# Altium PCB PCB1.PcbDoc
Units mm, origin at the board's own origin, x right, y up, seen from the top; angles counter-clockwise.
Board outline 47.5 x 26.5 mm, 2 copper layers (Top Layer, Bottom Layer), stack 1.571 mm thick; 7 components, 5 nets, 22 pads, 37 vias.
Unrouted connection lines stored in the file: 6.
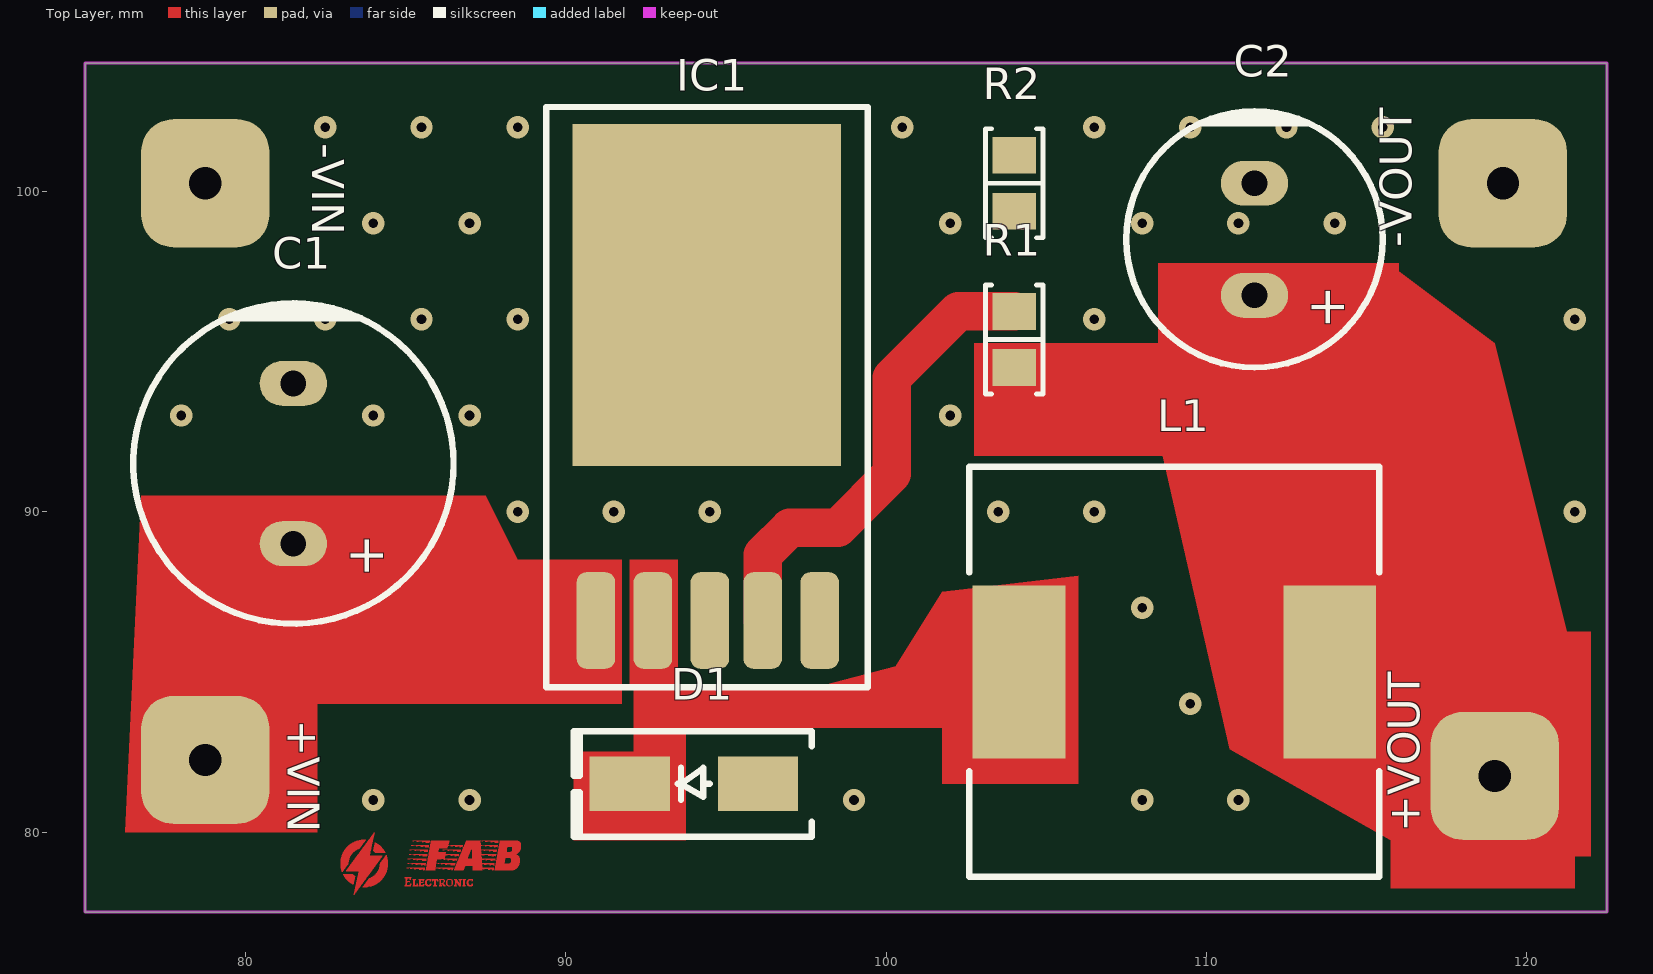
[diagram p0: Top Layer view]
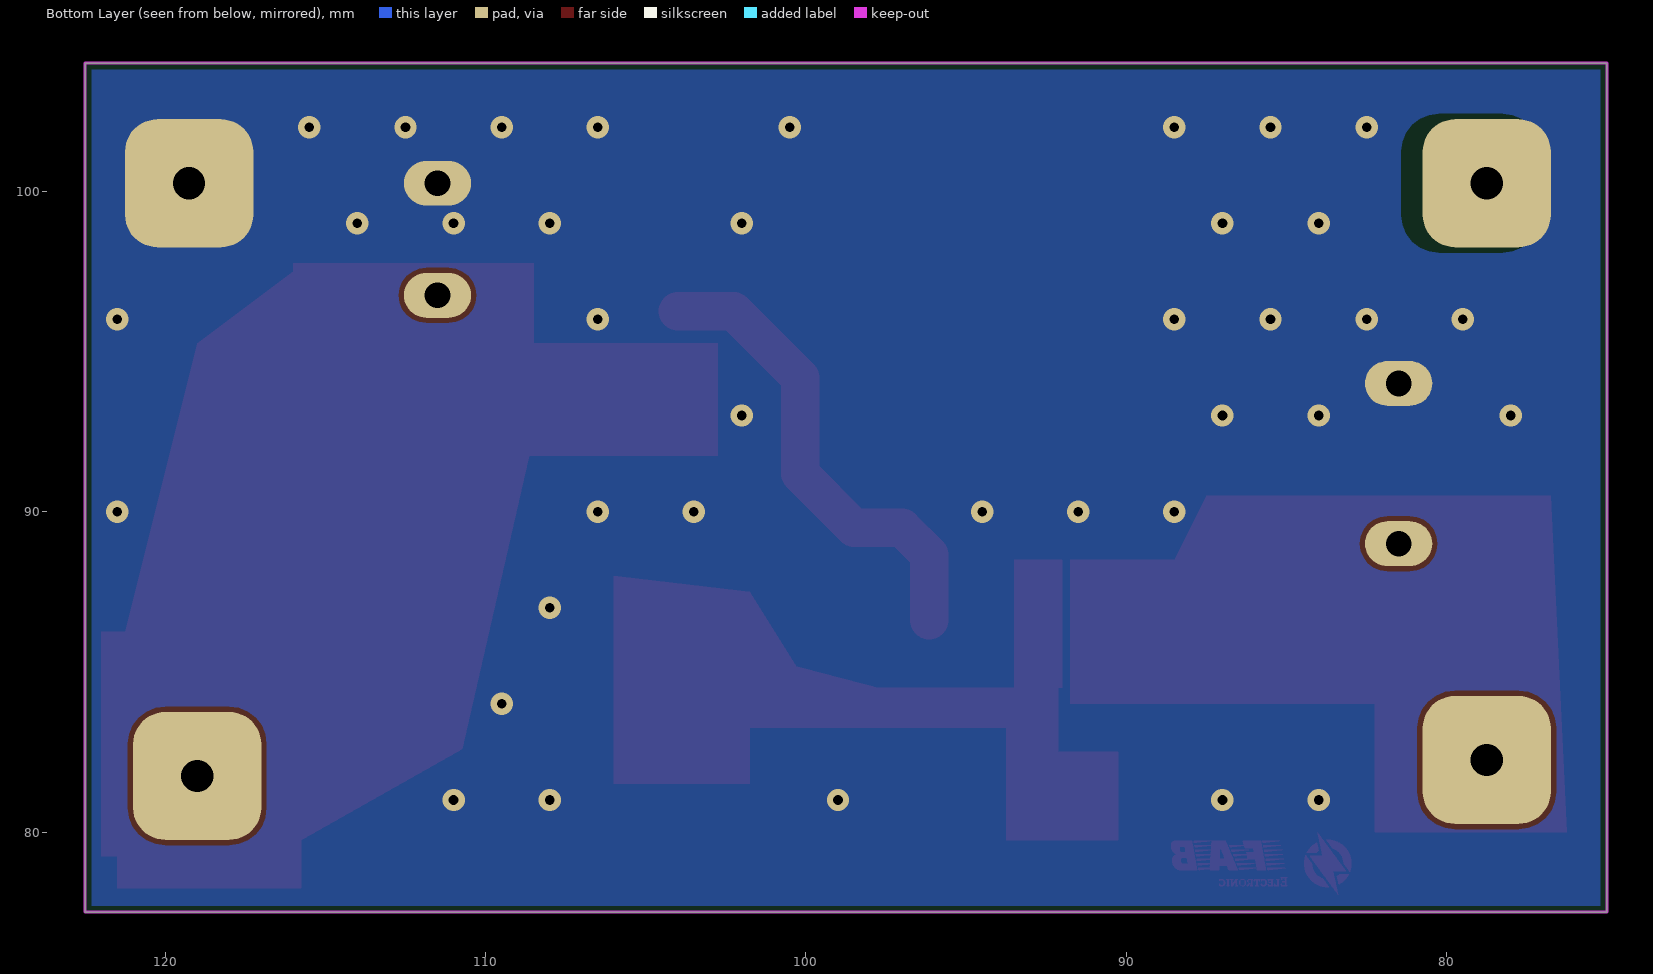
[diagram p1: Bottom Layer view, seen from below]
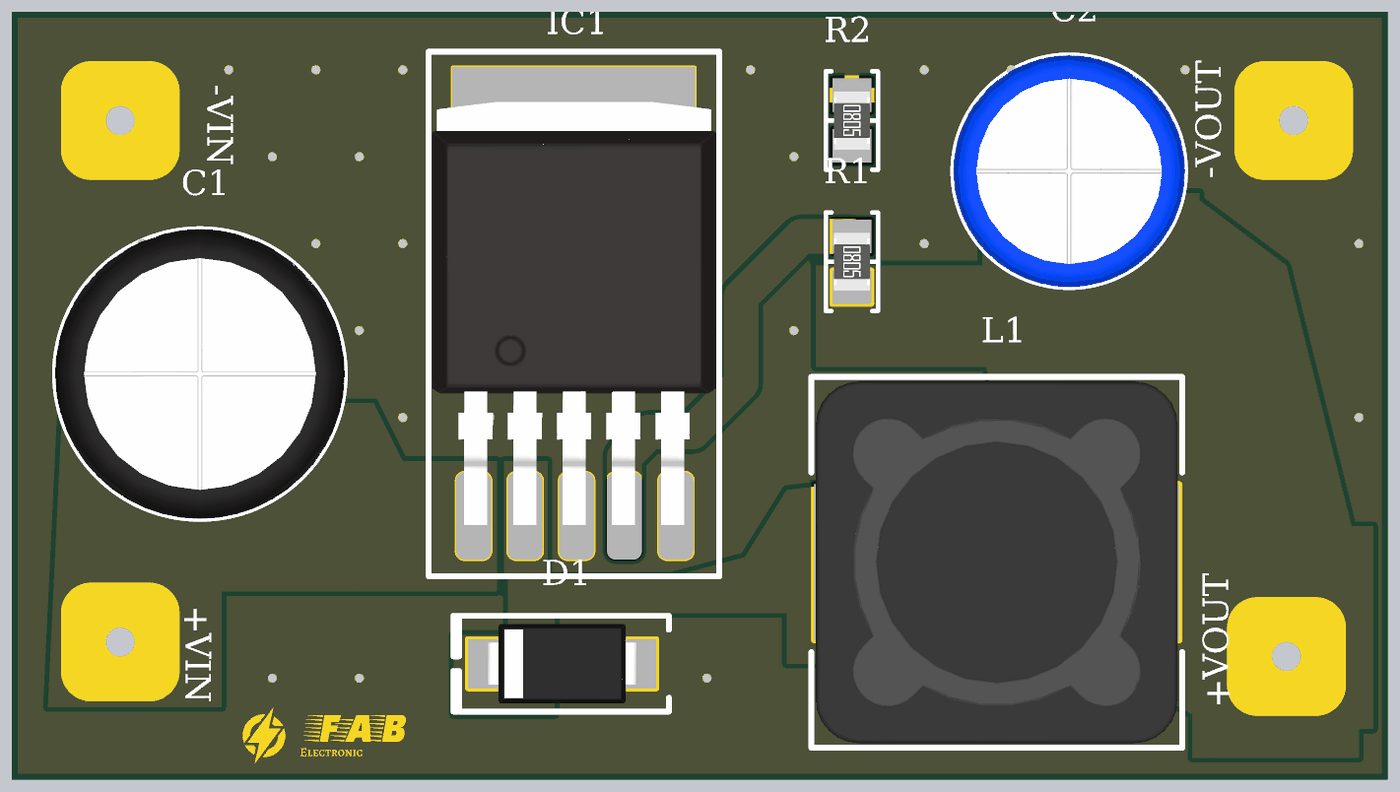
[diagram p2: 3D render of the assembled board from above, using the file's embedded part models]

## Layer stack, top to bottom
Top Solder: solder mask 0.0102, Solder Resist, Dk 3.5
Top Layer: signal copper 0.0356
Dielectric 1: dielectric 1.5, FR-4, Dk 4.8
Bottom Layer: signal copper 0.0356
Bottom Solder: solder mask 0.0102, Solder Resist, Dk 3.5

## Board outline
75,77.5 122.5,77.5 122.5,104 75,104

## Design rules (kind name [scope] priority, off if disabled: settings)
Clearance [All] p1: gap=0.152 ignorepadtopadclearanceinfootprint=FALSE
HoleSize [All] p1: absolutevalues=TRUE maxlimit=5 minlimit=0.025 maxpercent=80.000 minpercent=20.000
PolygonConnect [All] p1: thpad.connectstyle=Direct thpad.reliefconductorwidth=0.254 thpad.reliefentries=4 thpad.polygonreliefangle="90 Angle" thpad.airgapwidth=0.254 smdpad.connectstyle=Relief smdpad.reliefconductorwidth=0.5 smdpad.reliefentries=4 smdpad.polygonreliefangle="90 Angle" smdpad.airgapwidth=0.2 via.connectstyle=Direct via.reliefconductorwidth=0.254 via.reliefentries=4 via.polygonreliefangle="90 Angle" via.airgapwidth=0.254
RoutingVias [All] p1: holewidth=0.711 width=1.27 viastyle="Through Hole" minholewidth=0.711 minwidth=1.27 maxholewidth=0.711 maxwidth=1.27
SolderMaskExpansion [All] p1: expansion=0.102 istentingtop=FALSE
Width [All] p1: maxlimit=2 minlimit=0.152 preferedwidth=0.5
29 further rules are at their usual default settings.

## Components (designator, comment, footprint, x,y, rotation, side; value= is the part's Value field where it differs from the comment)
C1 "100µF" "CAP TH ALUM ELEC D10.00mm S5.00mm H10.50mm" 81.5,91.5 r270 top
C2 "220 µF" "CAP TH ALPOLY D8.00mm S3.50mm H13.50mm" 111.5,98.5 r270 top
D1 "ACDBA560-HF" "DO214AC SMA" 94,81.5 r180 top
IC1 "LM2596" D2PAK 94.5,96 r0 top
L1 "33 µH" "BOURNS SRR1280" 109,85 r0 top
R1 "10 kOhms" "RES 0805_2012" 104,95.375 r270 top
R2 "4.7 kOhms" "RES 0805_2012" 104,100.25 r270 top

## Footprints (in the part's own frame and the unit in brackets; to place one, negate y for a bottom-side part, rotate by r counter-clockwise, add the part's x,y. Pads: shape width x height; smd on the part's side, far side on the other; paste and mask are expansions set on the pad)
"BOURNS SRR1280" [mm] "Precision Wire Wound Inductor, 2-Leads, Body 12.50x12.50mm, IPC Medium Density"
  rect 2.9x5.4 smd: 1(-4.85,0) 2(4.85,0)
  silkscreen extent -6.4,-6.4 6.4,6.4, body extent -6.25,-6.25 6.25,6.25, height 7.9
"CAP TH ALPOLY D8.00mm S3.50mm H13.50mm" [mm] "8.00mm Diameter 13.50mm Lead Spacing Aluminum - Polymer Capacitors Radial, Can"
  oval 1.4x2.1 hole 0.8: 1(1.75,0) 2(-1.75,0)
  silkscreen extent -4,-4 4,4, body extent -4.01,-4 4,4, height 13.5
"CAP TH ALUM ELEC D10.00mm S5.00mm H10.50mm" [mm] "10mm Diameter 5mm Lead Spacing Aluminum Electrolytic Capacitors Radial, Can"
  oval 1.4x2.1 hole 0.8: 1(2.5,0) 2(-2.5,0)
  silkscreen extent -5,-5 5,5, body extent -5.01,-5 5,5, height 10.5
D2PAK [mm]
  rrect50% 1.2x3.015 smd mask+0.05: 1(-3.556,-9.398) 2(-1.778,-9.398) 3(0,-9.398) 4(1.651,-9.398) 5(3.429,-9.398)
  rect 8.38x10.66 smd mask+0.05: 3(-0.102,0.762)
  silkscreen extent -5.11,-11.48 4.93,6.63, body extent -5,-9.71 4.83,4.89, height 4.22
"DO214AC SMA" [mm] "Molded Diode, 2-Leads, Body 4.30x2.60mm, IPC Medium Density"
  rect 2.5x1.7 smd: 1(-2,0) 2(2,0)
  silkscreen extent -3.68,-1.65 3.75,1.65, body extent -2.6,-1.37 2.6,1.37, height 2.4
"RES 0805_2012" [mm] "Chip Resistor, 2-Leads, Body 2.00x1.25mm, IPC Medium Density"
  rect 1.15x1.35 smd: 1(-0.875,0) 2(0.875,0)
  silkscreen extent -1.7,-0.9 1.7,0.9, body extent -1,-0.62 1,0.63, height 0.6

## Part data
C1: library part URS1J101MPD1TD, "CAP ALUM 100UF 20% 63V RADIAL", Device Package="Radial, Can", Lifetime @ Temp.="2000 Hrs @ 85°C", manufacturer=Nichicon, Operating Temperature="-40°C ~ 85°C", Ripple Current @ High Frequency="375mA @ 10kHz", Ripple Current @ Low Frequency="250mA @ 120Hz", Supplier Part Number 1=493-11829-1-ND, Tolerance=±20%, Voltage - Rated=63V, Applications="General Purpose", Capacitance=100µF, componentlink1description=Datasheet, componentlink1url=http://nichicon-us.com/english/products/pdfs/e-urs.pdf, componentlink2description="DigiKey Link", componentlink2url=http://digikey.com/product-detail/en/nichicon/URS1J101MPD1TD/493-11829-1-ND/4320229, Height - Seated (Max)="0.413\" (10.50mm)", lastupdated="2.09.2020 01:26:22", Lead Spacing="0.197\" (5.00mm)", Lifecycle Status=Active, Minimum Order=1, Mounting Type="Through Hole", Package / Case="Radial, Can", packaging=TapeAndBox, Part Number=URS1J101MPD1TD, Part Status=Active, partid=9501, Polarization=Polar, price=0.18, series=URS, Size / Dimension="0.394\" Dia (10.00mm)", Supplier 1=DigiKey
C2: library part 227AVG035MFBJ, "CAP ALUM POLY 220UF 20% 35V T/H", Device Package="Radial, Can", ESR (Equivalent Series Resistance)=26mOhm, Lifetime @ Temp.="1500 Hrs @ 125°C", manufacturer="Illinois Capacitor", Operating Temperature="-55°C ~ 125°C", Ripple Current @ High Frequency="2.95 A @ 100 kHz", Ripple Current @ Low Frequency="147.5 mA @ 120 Hz", Supplier Part Number 1=1572-1695-ND, Tolerance=±20%, Voltage - Rated="35 V", Applications="General Purpose", Capacitance="220 µF", componentlink1description=Datasheet, componentlink1url=http://www.illinoiscapacitor.com/pdf/seriesDocuments/AVG%20series.pdf, componentlink2description="DigiKey Link", componentlink2url=https://www.digikey.com/en/products/detail/illinois-capacitor/227AVG035MFBJ/5411696, Height - Seated (Max)="0.532\" (13.50mm)", lastupdated="6.05.2023 20:46:02", Lead Spacing="0.138\" (3.50mm)", Lifecycle Status=Active, Minimum Order=1, Mounting Type="Through Hole", Package / Case="Radial, Can", packaging=Bulk, Part Number=227AVG035MFBJ, Part Status=Active, partid=3875, price=1.05, series=AVG, Size / Dimension="0.315\" Dia (8.00mm)", Supplier 1=DigiKey, Type=Polymer
D1: "DIODE SCHOTTKY 60V 5A DO214AC", Capacitance @ Vr, F="250pF @ 4V, 1MHz", Current - Average Rectified (Io)=5A, Current - Reverse Leakage @ Vr="500 µA @ 60 V", manufacturer="Comchip Technology", Operating Temperature - Junction="-55°C ~ 125°C", Package / Case="DO-214AC, SMA", Supplier Device Package="DO-214AC (SMA)", Supplier Part Number 1=641-2078-1-ND, Voltage - DC Reverse (Vr) (Max)="60 V", Voltage - Forward (Vf) (Max) @ If="700 mV @ 5 A", componentlink1description=Datasheet, componentlink1url=http://www.comchiptech.com/admin/files/product/ACDBA560-HF%20RevA201382.pdf, componentlink2description="DigiKey Link", componentlink2url=https://www.digikey.com/en/products/detail/comchip-technology/ACDBA560-HF/7100903, Diode Type=Schottky, lastupdated="6.05.2023 20:10:43", Lifecycle Status=Active, Minimum Order=1, Mounting Type="Surface Mount", packaging=TapeAndReel, Part Number=ACDBA560-HF, Part Status=Active, partid=1832, price=0.15, series="Automotive, AEC-Q101", Speed="Fast Recovery =< 500ns, > 200mA (Io)", Supplier 1=DigiKey
L1: library part SRR1280-330M, "FIXED IND 33UH 3.5A 57 MOHM SMD", Current - Saturation=3.3A, Current Rating (Amps)="3.5 A", DC Resistance (DCR)="57mOhm Max", Device Package=Nonstandard, Frequency - Self Resonant=9.5MHz, manufacturer="Bourns Inc.", Operating Temperature="-40°C ~ 125°C", Q @ Freq="28 @ 2.52MHz", Supplier Part Number 1=SRR1280-330MCT-ND, Tolerance=±20%, Inductance Frequency - Test="100 kHz", componentlink1description=Datasheet, componentlink1url=https://www.bourns.com/docs/Product-Datasheets/SRR1280.pdf, componentlink2description="DigiKey Link", componentlink2url=https://www.digikey.com/en/products/detail/bourns-inc/SRR1280-330M/1969998, Height - Seated (Max)="0.315\" (8.00mm)", lastupdated="6.05.2023 20:20:35", Lifecycle Status=Active, Material - Core=Ferrite, Minimum Order=1, Mounting Type="Surface Mount", Package / Case=Nonstandard, packaging=TapeAndReel, Part Number=SRR1280-330M, Part Status=Active, partid=25, price=0.53, series=SRR1280, Shielding=Shielded, Size / Dimension="0.492\" L x 0.492\" W (12.50mm x 12.50mm)", Supplier 1=DigiKey, Type="Drum Core, Wirewound", Inductance="33 µH"
R1: library part CRGP0805F10K, "RES 10K OHM 1% 1/3W 0805", Device Package="0805 (2012 Metric)", manufacturer="TE Connectivity Passive Product", Operating Temperature="-55°C ~ 155°C", Power (Watts)="0.333W, 1/3W", Supplier Device Package=0805, Supplier Part Number 1=A130489CT-ND, Temperature Coefficient=±100ppm/°C, Tolerance=±1%, componentlink1description=Datasheet, componentlink1url=https://www.te.com/commerce/DocumentDelivery/DDEController?Action=srchrtrv&DocNm=9-1773463-9&DocType=DS&DocLang=English, componentlink2description="DigiKey Link", componentlink2url=https://www.digikey.com/en/products/detail/te-connectivity-passive-product/CRGP0805F10K/8577091, Composition="Thick Film", Features="Pulse Withstanding", Height - Seated (Max)="0.026\" (0.65mm)", lastupdated="6.05.2023 19:56:35", Lifecycle Status=Active, Minimum Order=1, Number of Terminations=2, Package / Case="0805 (2012 Metric)", packaging=TapeAndReel, Part Number=CRGP0805F10K, Part Status=Active, partid=41700, price=0.02, Resistance="10 kOhms", series=CRGP, Size / Dimension="0.079\" L x 0.049\" W (2.00mm x 1.25mm)", Supplier 1=DigiKey
R2: library part CRGP0805F4K7, "RES 4.7K OHM 1% 1/3W 0805", Device Package="0805 (2012 Metric)", manufacturer="TE Connectivity Passive Product", Operating Temperature="-55°C ~ 155°C", Power (Watts)="0.333W, 1/3W", Supplier Device Package=0805, Supplier Part Number 1=A130485CT-ND, Temperature Coefficient=±100ppm/°C, Tolerance=±1%, componentlink1description=Datasheet, componentlink1url=https://www.te.com/commerce/DocumentDelivery/DDEController?Action=srchrtrv&DocNm=9-1773463-9&DocType=DS&DocLang=English, componentlink2description="DigiKey Link", componentlink2url=https://www.digikey.com/en/products/detail/te-connectivity-passive-product/CRGP0805F4K7/8577087, Composition="Thick Film", Features="Pulse Withstanding", Height - Seated (Max)="0.026\" (0.65mm)", lastupdated="6.05.2023 19:57:17", Lifecycle Status=Active, Minimum Order=1, Number of Terminations=2, Package / Case="0805 (2012 Metric)", packaging=TapeAndReel, Part Number=CRGP0805F4K7, Part Status=Active, partid=28726, price=0.02, Resistance="4.7 kOhms", series=CRGP, Size / Dimension="0.079\" L x 0.049\" W (2.00mm x 1.25mm)", Supplier 1=DigiKey

## Free pads (board coordinates)
  rrect50% 4x4 hole 1 mask+0.05: +VIN(78.75,82.25) +VOUT(119,81.75) -VIN(78.75,100.25) -VOUT(119.25,100.25)

## Via types
v1: diameter 0.7, hole 0.3, Top Layer to Bottom Layer, tented both sides, 37 vias

## Nets (pads, with @x,y where several pads share a name; then routed paths per layer and width w, separated by ;. In a path a pad name is that pad's centre, name@x,y a point inside that pad or via, vN(x,y) a via of type N, cw(c..) or ccw(c..) an arc to the next point about the centre after c; other vN are vias at no path point)
+12: C2.1 L1.2 pad.+VOUT R1.2
FeedBack: IC1.4 R1.1 R2.2 | length 14.9
  Top Layer w1.2: IC1.4 96.151,88.651 97,89.5 98.5,89.5 100.179,91.179 100.179,94.179 102.25,96.25 R1.1 R1.1@103.95,96.25
GND: C1.2 C2.2 D1.1 IC1.3 IC1.5 pad.-VIN pad.-VOUT R2.1
  other v1: 84,81 87,81 99,81 108,81 111,81 109.5,84 108,87 88.5,90 91.5,90 94.5,90 103.5,90 106.5,90 121.5,90 78,93 84,93 87,93 102,93 79.5,96 82.5,96 85.5,96 88.5,96 106.5,96 121.5,96 84,99 87,99 102,99 108,99 111,99 114,99 82.5,102 85.5,102 88.5,102 100.5,102 106.5,102 109.5,102 112.5,102 115.5,102
NetD1_2: D1.2 IC1.2 L1.1 | length 5.5
  Top Layer w1.2: D1.2 92.122,81.5 92.722,82.1 IC1.2
VCC: C1.1 IC1.1 pad.+VIN

## Polygon pours and split planes (outlines as drawn)
no net on Bottom Layer "NONET_L02_P001" (solid, pour order 1): 75,104 75,77.5 122.5,77.5 122.5,104
GND on Bottom Layer "GND_L02_P000" (solid, pour order 0): 75,104 75,77.5 122.5,77.5 122.5,104
GND on Top Layer "NONET_L01_P002" (solid, shelved, pour order 2): 75,104 75,77.5 122.5,77.5 122.5,104

## Keep-outs
Keep-Out Layer:
  the board outline again, w0.1

## Other copper
Top Layer:
  drawing of 31 lines, arcs and shapes, not listed

## Silkscreen, mask and mechanical layers (free items; w line width, h text height)
Top Overlay:
  text "-VIN" at 81.755,101.5 h1.72 r270
  text "-VOUT" at 116.737,98.25 h1.72 r90
  text "+VIN" at 81.005,83.5 h1.72 r270
  text "+VOUT" at 116.987,80 h1.72 r90
Top Solder:
  drawing of 28 lines, arcs and shapes, not listed

## Text inside footprints (layer, text, board x,y; h text height)
C1: Top Overlay "+" at 82.9,89.3 h2 r270
C2: Top Overlay "+" at 112.9,97.05 h2 r270